# Altium PCB AT89S52单片机入门与提高_粗.PcbDoc (part 2 of 5)
Units mm, origin at the board's own origin, x right, y up, seen from the top; angles counter-clockwise.
Board outline 152.4 x 101.6 mm, 2 copper layers (Top Layer, Bottom Layer); 111 components, 112 nets, 451 pads, 42 vias.
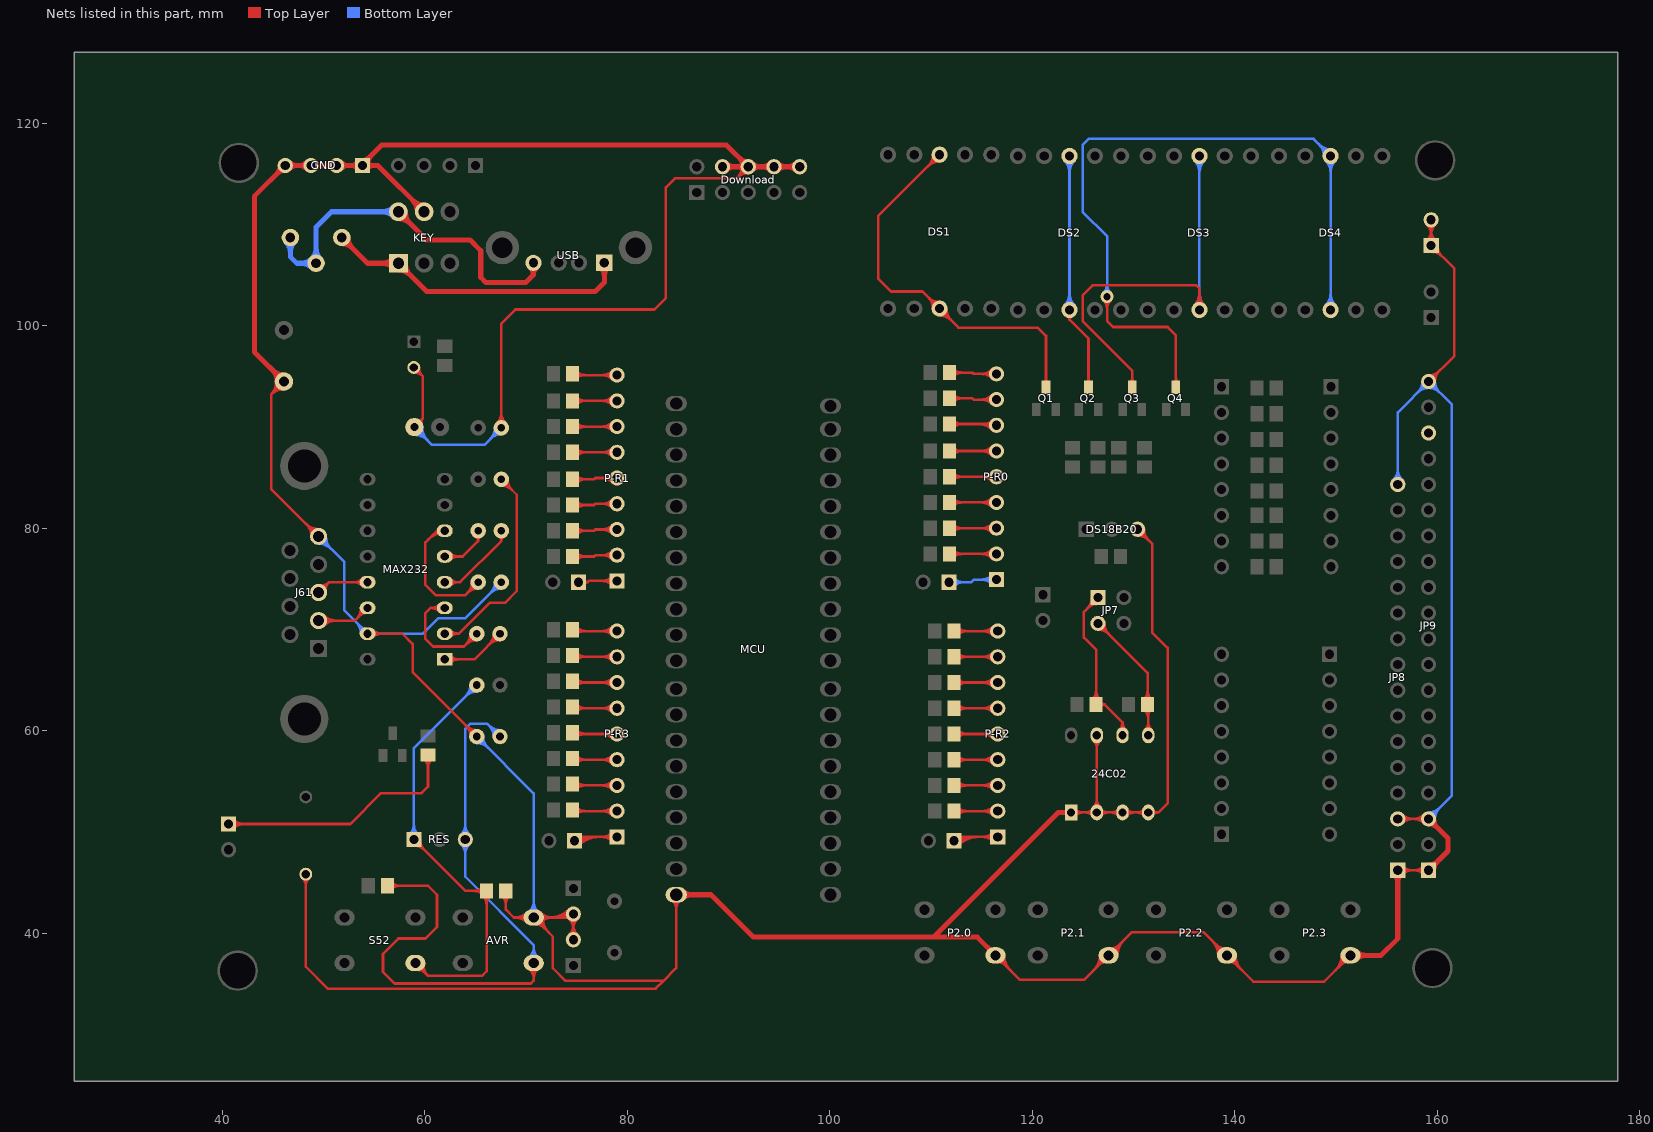
[diagram p2: the nets of this part, all layers, seen from the top]

## Via types
v1: diameter 1.27, hole 0.711, Top Layer to Bottom Layer, 42 vias

## Nets (pads, with @x,y where several pads share a name; then routed paths per layer and width w, separated by ;. In a path a pad name is that pad's centre, name@x,y a point inside that pad or via, vN(x,y) a via of type N, cw(c..) or ccw(c..) an arc to the next point about the centre after c; other vN are vias at no path point) (continued)
GND: 24C02.1 24C02.2 24C02.3 24C02.4 24C02.7 +5V.2@46.101,94.488 AVR.2 C1.2 C3.2 C5.2 C8.1 CX1.2 CX2.2 Download.4 Download.6 Download.8 Download.10 DS18B20.3 GND.1 GND.2 GND.3 GND.4 J61.5 JP8.1 JP8.3 JP8.16 JP9.1 JP9.3 JP9.20 KEY.3 LED1.2 LS1.2 MAX232.15 MCU.20 P2.0.1@116.355,37.831 P2.1.1 P2.2.1 P2.3.1 R51.2 | length 843.5
  Top Layer w0.254: +5V.2@45.317,94.458 cw(c43.656,94.393) 44.831,93.218 ; +5V.2@45.57,94.467 cw(c44.447,94.424) 45.242,93.629 cw(c46.037,92.834) +5V.2@46.08,93.957 ; +5V.2@46.071,93.704 ccw(c46.006,92.043) 44.831,93.218 ; +5V.2@46.101,94.488 44.831,93.218 ; LS1.2@47.901,45.488 cw(c47.034,44.621) 48.26,44.621 cw(c49.486,44.621) LS1.2@48.619,45.488 ; LS1.2@48.26,45.847 48.26,36.703 50.419,34.544 82.804,34.544 83.566,35.306 ; J61.5@48.81,79.2 ccw(c47.077,79.2) 48.302,80.426 ccw(c49.528,81.651) J61.5@49.528,79.918 ; J61.5@49.064,79.2 ccw(c47.944,79.2) 48.736,79.992 ccw(c49.528,80.784) J61.5@49.528,79.664 ; J61.5@49.528,79.2 44.831,83.897 44.831,93.218 ; MAX232.15@54.36,69.597 57.784,69.597 58.801,68.58 58.801,65.786 C3.2@65.151,59.436 ; MAX232.15@54.874,69.245 cw(c55.724,68.395) 55.724,69.597 cw(c55.724,70.799) MAX232.15@54.874,69.949 ; LED1.2@58.928,95.377 cw(c58.928,94.151) 59.795,95.018 cw(c60.662,95.885) LED1.2@59.436,95.885 ; LED1.2@58.928,95.885 59.817,94.996 59.817,90.83 ; C1.2@58.979,89.992 59.817,90.83 ; C3.2@64.516,59.436 ccw(c62.983,59.436) 64.067,60.52 ccw(c65.151,61.604) C3.2@65.151,60.071 ; C3.2@64.77,59.436 ccw(c63.85,59.436) 64.501,60.086 ccw(c65.151,60.737) C3.2@65.151,59.817 ; C5.2@67.115,90.365 ccw(c66.031,91.449) 67.564,91.449 ccw(c69.097,91.449) C5.2@68.013,90.365 ; C5.2@67.295,90.185 ccw(c66.644,90.836) 67.564,90.836 ccw(c68.484,90.836) C5.2@67.833,90.185 ; C5.2@67.564,89.916 67.564,100.203 68.961,101.6 82.677,101.6 83.82,102.743 83.82,113.665 84.709,114.554 90.805,114.554 Download.6@91.948,115.697 ; R51.2@67.636,43.726 cw(c66.743,42.833) 68.006,42.833 cw(c69.269,42.833) R51.2@68.376,43.726 ; R51.2@68.006,44.196 68.006,42.357 68.794,41.569 AVR.2@70.762,41.569 ; AVR.2@70.086,41.093 ccw(c68.937,39.944) 68.937,41.569 ccw(c68.937,43.194) AVR.2@70.086,42.045 ; AVR.2@70.266,41.273 ccw(c69.55,40.558) 69.55,41.569 ccw(c69.55,42.581) AVR.2@70.266,41.865 ; AVR.2@70.962,40.896 cw(c70.962,39.754) 71.769,40.562 ; AVR.2@71.258,41.273 cw(c71.974,40.558) 71.974,41.569 cw(c71.974,42.581) AVR.2@71.258,41.865 ; AVR.2@71.381,41.569 ccw(c72.875,41.569) 71.819,40.512 ; AVR.2@71.438,41.093 cw(c72.587,39.944) 72.587,41.569 cw(c72.587,43.194) AVR.2@71.438,42.045 ; AVR.2@71.635,41.569 ccw(c73.743,41.569) 72.252,40.079 ; 72.349,41.569 ccw(c72.349,44.237) CX2.2@74.235,42.351 ; 72.962,41.569 ccw(c72.962,43.624) CX2.2@74.415,42.171 ; 73.576,41.569 ccw(c73.576,43.01) CX2.2@74.595,41.991 ; 73.995,41.569 cw(c73.995,41.229) 74.235,41.469 cw(c73.172,40.406) 74.676,40.406 cw(c76.18,40.406) CX2.2@75.117,41.469 ; CX1.2@74.235,39.811 ccw(c73.172,40.874) 74.676,40.874 ccw(c76.18,40.874) CX1.2@75.117,39.811 ; CX1.2@74.415,39.631 ccw(c73.785,40.261) 74.676,40.261 ccw(c75.567,40.261) CX1.2@74.937,39.631 ; CX2.2@74.415,41.649 cw(c73.785,41.019) 74.676,41.019 cw(c75.567,41.019) CX2.2@74.937,41.649 ; CX1.2@74.676,39.37 CX2.2@74.676,41.91 74.335,41.569 AVR.2@70.762,41.569 ; MCU.20@84.394,43.373 cw(c83.326,42.305) 84.836,42.305 cw(c86.346,42.305) MCU.20@85.278,43.373 ; MCU.20@84.573,43.552 cw(c83.939,42.918) 84.836,42.918 cw(c85.733,42.918) MCU.20@85.099,43.552 ; MCU.20@84.836,43.815 84.836,36.576 83.566,35.306 ; Download.6@91.325,115.697 cw(c89.821,115.697) 90.884,114.633 cw(c91.948,113.57) Download.6@91.948,115.074 ; Download.6@91.579,115.697 cw(c90.688,115.697) 91.318,115.067 cw(c91.948,114.437) Download.6@91.948,115.328 ; 113.284,42.672 120.27,49.658 ; P2.0.1@116.355,37.831 118.753,35.433 125.133,35.433 P2.1.1@127.531,37.831 129.832,40.132 136.914,40.132 P2.2.1@139.215,37.831 141.821,35.225 148.801,35.225 P2.3.1@151.407,37.831 ; P2.0.1@116.555,37.158 cw(c116.555,36.016) 117.362,36.824 ; P2.0.1@116.974,37.831 ccw(c118.468,37.831) 117.412,36.775 ; P2.0.1@117.228,37.831 ccw(c119.336,37.831) 117.845,36.341 ; 24C02.1@123.826,51.939 24C02.4@131.446,51.939 132.457,51.939 ; 24C02.2@126.025,52.458 ccw(c125.201,53.282) 126.366,53.282 ccw(c127.531,53.282) 24C02.2@126.707,52.458 ; 24C02.7@126.025,59.04 cw(c125.201,58.216) 126.366,58.216 cw(c127.531,58.216) 24C02.7@126.707,59.04 ; 126.041,36.341 ccw(c124.55,37.831) P2.1.1@126.658,37.831 ; 24C02.2@126.366,51.939 24C02.7@126.366,59.559 ; 126.474,36.775 ccw(c125.418,37.831) P2.1.1@126.912,37.831 ; 126.524,36.824 cw(c127.331,36.016) P2.1.1@127.331,37.158 ; P2.1.1@127.731,38.504 ccw(c127.731,39.646) 128.538,38.839 ; P2.1.1@128.15,37.831 cw(c129.644,37.831) 128.588,38.888 ; P2.1.1@128.404,37.831 cw(c130.512,37.831) 129.021,39.322 ; 24C02.3@129.247,51.598 cw(c130.071,50.774) 130.071,51.939 cw(c130.071,53.104) 24C02.3@129.247,52.28 ; DS18B20.3@130.399,79.282 cw(c130.399,77.778) 131.463,78.841 cw(c132.526,79.905) DS18B20.3@131.022,79.905 ; DS18B20.3@130.399,79.536 cw(c130.399,78.645) 131.029,79.275 cw(c131.659,79.905) DS18B20.3@130.768,79.905 ; DS18B20.3@130.399,79.905 131.826,78.478 131.826,69.723 133.35,68.199 133.35,52.832 132.457,51.939 ; 24C02.4@131.105,51.598 ccw(c130.281,50.774) 130.281,51.939 ccw(c130.281,53.104) 24C02.4@131.105,52.28 ; 24C02.4@131.821,51.636 cw(c132.457,51.121) 132.457,51.939 ; 24C02.4@131.821,52.243 ccw(c132.457,52.757) 132.457,51.939 ; 137.725,39.322 cw(c136.234,37.831) P2.2.1@138.342,37.831 ; 138.158,38.888 cw(c137.102,37.831) P2.2.1@138.596,37.831 ; 138.208,38.839 ccw(c139.015,39.646) P2.2.1@139.015,38.504 ; P2.2.1@139.415,37.158 cw(c139.415,36.016) 140.222,36.824 ; P2.2.1@139.834,37.831 ccw(c141.328,37.831) 140.272,36.775 ; P2.2.1@140.088,37.831 ccw(c142.196,37.831) 140.705,36.341 ; 149.917,36.341 ccw(c148.426,37.831) P2.3.1@150.534,37.831 ; 150.35,36.775 ccw(c149.294,37.831) P2.3.1@150.788,37.831 ; 150.4,36.824 cw(c151.207,36.016) P2.3.1@151.207,37.158 ; JP8.1@156.083,46.228 JP9.1@159.131,46.228 ; JP8.3@156.083,51.308 JP9.3@159.131,51.308 ; JP8.1@156.344,45.967 cw(c156.974,45.337) 156.974,46.228 cw(c156.974,47.119) JP8.1@156.344,46.489 ; JP8.3@156.344,51.047 cw(c156.974,50.417) 156.974,51.308 cw(c156.974,52.199) JP8.3@156.344,51.569 ; JP8.1@156.524,45.787 cw(c157.587,44.724) 157.587,46.228 cw(c157.587,47.732) JP8.1@156.524,46.669 ; JP8.3@156.524,50.867 cw(c157.587,49.804) 157.587,51.308 cw(c157.587,52.812) JP8.3@156.524,51.749 ; JP9.1@158.69,45.787 ccw(c157.627,44.724) 157.627,46.228 ccw(c157.627,47.732) JP9.1@158.69,46.669 ; JP9.3@158.69,50.867 ccw(c157.627,49.804) 157.627,51.308 ccw(c157.627,52.812) JP9.3@158.69,51.749 ; JP9.1@158.87,45.967 ccw(c158.24,45.337) 158.24,46.228 ccw(c158.24,47.119) JP9.1@158.87,46.489 ; JP9.3@158.87,51.047 ccw(c158.24,50.417) 158.24,51.308 ccw(c158.24,52.199) JP9.3@158.87,51.569 ; GND.1@158.939,108.361 ccw(c157.876,109.424) 159.38,109.424 ccw(c160.884,109.424) GND.1@159.821,108.361 ; GND.2@158.939,110.019 cw(c157.876,108.956) 159.38,108.956 cw(c160.884,108.956) GND.2@159.821,110.019 ; GND.1@159.119,108.181 ccw(c158.489,108.811) 159.38,108.811 ccw(c160.271,108.811) GND.1@159.641,108.181 ; GND.2@159.119,110.199 cw(c158.489,109.569) 159.38,109.569 cw(c160.271,109.569) GND.2@159.641,110.199 ; JP9.20@159.131,94.488 161.671,97.028 161.671,105.629 GND.1@159.38,107.92 GND.2@159.38,110.46 ; JP9.20@159.131,94.857 ccw(c159.131,95.748) 159.761,95.118 ccw(c160.391,94.488) JP9.20@159.5,94.488 ; JP9.20@159.131,95.111 ccw(c159.131,96.615) 160.195,95.552 ccw(c161.258,94.488) JP9.20@159.754,94.488 ; GND.1@159.38,107.297 cw(c159.38,105.793) 160.444,106.856 cw(c161.507,107.92) GND.1@160.003,107.92 ; GND.1@159.38,107.551 cw(c159.38,106.66) 160.01,107.29 cw(c160.64,107.92) GND.1@159.749,107.92 ; 59.817,90.83 ccw(c60.186,90.461) 59.699,90.272 cw(c60.186,90.461) 59.817,90.83 ; 59.817,90.83 cw(c59.448,91.2) 59.259,90.713 ccw(c59.448,91.2) 59.817,90.83 ; AVR.2@70.762,41.569 72.644,39.687 72.644,36.576 73.914,35.306 83.566,35.306 ; 24C02.1@124.167,51.598 cw(c124.991,50.774) 124.991,51.939 ; 24C02.1@124.167,51.598 cw(c124.991,50.774) 124.991,51.939 ; 24C02.1@124.167,51.598 cw(c124.991,50.774) 124.991,51.939 ; 24C02.1@124.167,52.28 ccw(c124.991,53.104) 124.991,51.939 ; 24C02.1@124.167,52.28 ccw(c124.991,53.104) 124.991,51.939 ; 24C02.1@124.167,52.28 ccw(c124.991,53.104) 124.991,51.939 ; 125.201,51.939 ccw(c125.201,53.104) 24C02.2@126.025,52.28 ; 125.201,51.939 cw(c125.201,50.774) 24C02.2@126.025,51.598 ; 125.201,51.939 ccw(c125.201,53.104) 24C02.2@126.025,52.28 ; 125.201,51.939 cw(c125.201,50.774) 24C02.2@126.025,51.598 ; 125.201,51.939 ccw(c125.201,53.104) 24C02.2@126.025,52.28 ; 125.201,51.939 cw(c125.201,50.774) 24C02.2@126.025,51.598 ; 127.531,51.939 ccw(c127.531,50.774) 126.707,51.598 cw(c127.531,50.774) 127.531,51.939 ; 127.531,51.939 cw(c127.531,53.104) 126.707,52.28 ccw(c127.531,53.104) 127.531,51.939 ; 127.741,51.939 ccw(c127.741,53.104) 128.565,52.28 cw(c127.741,53.104) 127.741,51.939 ; 127.741,51.939 cw(c127.741,50.774) 128.565,51.598 ccw(c127.741,50.774) 127.741,51.939
  Top Layer w0.5: +5V.2@45.439,94.488 ccw(c43.841,94.488) 44.971,95.618 ccw(c46.101,96.748) +5V.2@46.101,95.15 ; GND.4@45.728,115.824 cw(c44.521,115.824) 45.374,114.97 cw(c46.228,114.117) GND.4@46.228,115.324 ; +5V.2@46.101,94.488 43.18,97.409 43.18,112.776 GND.4@46.228,115.824 55.372,115.824 KEY.3@59.944,111.252 ; GND.4@46.582,115.47 cw(c47.435,114.617) 47.435,115.824 cw(c47.435,117.031) GND.4@46.582,116.178 ; GND.3@48.414,115.47 ccw(c47.561,114.617) 47.561,115.824 ccw(c47.561,117.031) GND.3@48.414,116.178 ; GND.3@49.122,115.47 cw(c49.975,114.617) 49.975,115.824 cw(c49.975,117.031) GND.3@49.122,116.178 ; GND.2@50.954,115.47 ccw(c50.101,114.617) 50.101,115.824 ccw(c50.101,117.031) GND.2@50.954,116.178 ; GND.2@51.662,115.47 cw(c52.515,114.617) 52.515,115.824 cw(c52.515,117.031) GND.2@51.662,116.178 ; GND.1@53.494,115.47 ccw(c52.641,114.617) 52.641,115.824 ccw(c52.641,117.031) GND.1@53.494,116.178 ; GND.1@53.848,115.824 53.848,115.951 55.753,117.856 89.789,117.856 Download.6@91.948,115.697 ; GND.1@53.848,116.324 ccw(c53.848,117.224) 54.485,116.588 ; GND.1@54.202,115.47 cw(c55.055,114.617) 55.055,115.824 cw(c55.055,117.031) GND.1@54.202,116.178 ; GND.1@54.348,115.824 cw(c55.862,115.824) 54.791,116.894 ; KEY.3@59.269,111.252 ccw(c57.639,111.252) 58.792,112.404 ccw(c59.944,113.557) KEY.3@59.944,111.927 ; MCU.20@84.836,43.815 88.265,43.815 92.456,39.624 114.562,39.624 P2.0.1@116.355,37.831 ; MCU.20@85.491,43.46 cw(c86.349,42.602) 86.349,43.815 cw(c86.349,45.028) MCU.20@85.491,44.17 ; Download.4@89.408,115.697 Download.10@97.028,115.697 ; Download.4@89.762,115.343 cw(c90.615,114.49) 90.615,115.697 cw(c90.615,116.904) Download.4@89.762,116.051 ; Download.6@91.448,115.697 ccw(c90.241,115.697) 91.094,116.551 ccw(c91.948,117.404) Download.6@91.948,116.197 ; Download.6@92.302,115.343 cw(c93.155,114.49) 93.155,115.697 cw(c93.155,116.904) Download.6@92.302,116.051 ; Download.8@94.134,115.343 ccw(c93.281,114.49) 93.281,115.697 ccw(c93.281,116.904) Download.8@94.134,116.051 ; Download.8@94.842,115.343 cw(c95.695,114.49) 95.695,115.697 cw(c95.695,116.904) Download.8@94.842,116.051 ; Download.10@96.674,115.343 ccw(c95.821,114.49) 95.821,115.697 ccw(c95.821,116.904) Download.10@96.674,116.051 ; 110.236,39.624 122.551,51.939 24C02.1@123.826,51.939 ; P2.3.1@151.407,37.831 154.432,37.831 156.083,39.482 JP8.1@156.083,46.228 ; P2.3.1@151.996,37.442 cw(c152.935,36.503) 152.935,37.831 cw(c152.935,39.159) P2.3.1@151.996,38.22 ; JP8.1@155.729,45.874 cw(c154.876,45.021) 156.083,45.021 cw(c157.29,45.021) JP8.1@156.437,45.874 ; JP9.1@159.131,46.228 161.036,48.133 161.036,49.403 JP9.3@159.131,51.308 ; JP9.1@159.131,46.728 ccw(c159.131,47.935) 159.985,47.082 ccw(c160.838,46.228) JP9.1@159.631,46.228 ; JP9.3@159.131,50.808 cw(c159.131,49.601) 159.985,50.454 cw(c160.838,51.308) JP9.3@159.631,51.308 ; 90.741,115.697 ccw(c90.741,116.904) 91.594,116.051 cw(c90.741,116.904) 90.741,115.697 ; 90.741,115.697 cw(c90.741,114.49) 91.594,115.343 ccw(c90.741,114.49) 90.741,115.697
  Bottom Layer w0.254: J61.5@49.528,79.2 52.07,76.658 52.07,71.887 MAX232.15@54.36,69.597 59.818,69.597 61.341,71.12 64.008,71.12 C8.1@67.564,74.676 ; C1.2@58.979,89.992 60.731,88.24 65.888,88.24 C5.2@67.564,89.916 ; C3.2@65.151,59.436 70.762,53.825 AVR.2@70.762,41.569 ; JP8.16@156.083,84.328 156.083,91.44 JP9.20@159.131,94.488 161.417,92.202 161.417,53.594 JP9.3@159.131,51.308 ; 50.32,78.408 ccw(c49.528,77.616) 49.528,78.736 cw(c49.528,77.616) 50.32,78.408 ; 50.32,78.408 cw(c51.112,79.2) 49.992,79.2 ccw(c51.112,79.2) 50.32,78.408 ; 50.754,77.974 ccw(c49.528,76.749) 49.528,78.482 cw(c49.528,76.749) 50.754,77.974 ; 50.754,77.974 cw(c51.979,79.2) 50.246,79.2 ccw(c51.979,79.2) 50.754,77.974 ; 55.724,69.597 ccw(c55.724,68.395) 54.874,69.245 cw(c55.724,68.395) 55.724,69.597 ; 55.724,69.597 cw(c55.724,70.799) 54.874,69.949 ccw(c55.724,70.799) 55.724,69.597 ; 59.865,89.106 ccw(c58.979,88.22) 58.979,89.473 cw(c58.979,88.22) 59.865,89.106 ; 59.865,89.106 cw(c60.751,89.992) 59.498,89.992 ccw(c60.751,89.992) 59.865,89.106 ; 60.298,88.673 ccw(c58.979,87.353) 58.979,89.219 cw(c58.979,87.353) 60.298,88.673 ; 60.298,88.673 cw(c61.618,89.992) 59.752,89.992 ccw(c61.618,89.992) 60.298,88.673 ; 65.801,58.786 ccw(c65.151,58.135) 65.151,59.055 cw(c65.151,58.135) 65.801,58.786 ; 65.801,58.786 cw(c66.452,59.436) 65.532,59.436 ccw(c66.452,59.436) 65.801,58.786 ; 66.235,58.352 ccw(c65.151,57.268) 65.151,58.801 cw(c65.151,57.268) 66.235,58.352 ; 66.235,58.352 cw(c67.319,59.436) 65.786,59.436 ccw(c67.319,59.436) 66.235,58.352 ; 66.48,73.592 ccw(c65.396,74.676) 66.929,74.676 cw(c65.396,74.676) 66.48,73.592 ; 66.48,73.592 cw(c67.564,72.508) 67.564,74.041 ccw(c67.564,72.508) 66.48,73.592 ; 66.48,88.832 ccw(c65.396,89.916) 66.929,89.916 cw(c65.396,89.916) 66.48,88.832 ; 66.48,88.832 cw(c67.564,87.748) 67.564,89.281 ccw(c67.564,87.748) 66.48,88.832 ; 66.914,74.026 ccw(c66.263,74.676) 67.183,74.676 cw(c66.263,74.676) 66.914,74.026 ; 66.914,74.026 cw(c67.564,73.375) 67.564,74.295 ccw(c67.564,73.375) 66.914,74.026 ; 66.914,89.266 ccw(c66.263,89.916) 67.183,89.916 cw(c66.263,89.916) 66.914,89.266 ; 66.914,89.266 cw(c67.564,88.615) 67.564,89.535 ccw(c67.564,88.615) 66.914,89.266 ; 70.762,42.581 ccw(c71.774,42.581) 71.058,41.865 cw(c71.774,42.581) 70.762,42.581 ; 70.762,42.581 cw(c69.75,42.581) 70.466,41.865 ccw(c69.75,42.581) 70.762,42.581 ; 70.762,43.194 ccw(c72.387,43.194) 71.238,42.045 cw(c72.387,43.194) 70.762,43.194 ; 70.762,43.194 cw(c69.137,43.194) 70.286,42.045 ccw(c69.137,43.194) 70.762,43.194 ; 156.083,85.219 ccw(c156.974,85.219) 156.344,84.589 cw(c156.974,85.219) 156.083,85.219 ; 156.083,85.219 cw(c155.192,85.219) 155.822,84.589 ccw(c155.192,85.219) 156.083,85.219 ; 156.083,85.832 ccw(c157.587,85.832) 156.524,84.769 cw(c157.587,85.832) 156.083,85.832 ; 156.083,85.832 cw(c154.579,85.832) 155.642,84.769 ccw(c154.579,85.832) 156.083,85.832 ; 158.067,93.424 ccw(c157.004,94.488) 158.508,94.488 cw(c157.004,94.488) 158.067,93.424 ; 158.067,93.424 cw(c159.131,92.361) JP9.20@159.131,93.865 ; 158.067,93.424 cw(c159.131,92.361) JP9.20@159.131,93.865 ; 158.501,93.858 ccw(c157.871,94.488) 158.762,94.488 cw(c157.871,94.488) 158.501,93.858 ; 158.501,93.858 cw(c159.131,93.228) JP9.20@159.131,94.119 ; 158.501,93.858 cw(c159.131,93.228) JP9.20@159.131,94.119 ; JP9.20@159.131,93.865 cw(c159.131,92.361) 160.195,93.424 ; JP9.20@159.131,93.865 cw(c159.131,92.361) 160.195,93.424 ; JP9.20@159.131,94.119 cw(c159.131,93.228) 159.761,93.858 ; JP9.20@159.131,94.119 cw(c159.131,93.228) 159.761,93.858 ; 159.761,51.938 ccw(c160.391,51.308) 159.5,51.308 cw(c160.391,51.308) 159.761,51.938 ; 159.761,51.938 cw(c159.131,52.568) 159.131,51.677 ccw(c159.131,52.568) 159.761,51.938 ; 159.761,93.858 cw(c160.391,94.488) 159.5,94.488 ccw(c160.391,94.488) 159.761,93.858 ; 160.195,52.372 ccw(c161.258,51.308) 159.754,51.308 cw(c161.258,51.308) 160.195,52.372 ; 160.195,52.372 cw(c159.131,53.435) 159.131,51.931 ccw(c159.131,53.435) 160.195,52.372 ; 160.195,93.424 cw(c161.258,94.488) 159.754,94.488 ccw(c161.258,94.488) 160.195,93.424 ; 53.232,70.724 cw(c52.105,69.597) 53.699,69.597 ccw(c52.105,69.597) 53.232,70.724 ; 53.624,70.332 ccw(c54.197,70.905) 54.197,70.095 cw(c54.197,70.905) 53.624,70.332 ; 53.666,70.291 cw(c52.972,69.597) 53.953,69.597 ccw(c52.972,69.597) 53.666,70.291
NetAVR_1: AVR.1 C3.1 Ravr.1 RES.3 | length 101.1
  Top Layer w0.254: Ravr.1@56.322,44.704 60.325,44.704 61.214,43.815 61.214,40.64 60.071,39.497 57.404,39.497 55.88,37.973 55.88,36.195 57.023,35.052 70.485,35.052 70.762,35.329 AVR.1@70.762,37.069 ; Ravr.1@56.692,44.334 cw(c57.585,43.441) 57.585,44.704 cw(c57.585,45.967) Ravr.1@56.692,45.074 ; AVR.1@70.286,36.593 cw(c69.137,35.444) 70.762,35.444 cw(c72.387,35.444) AVR.1@71.238,36.593 ; AVR.1@70.466,36.773 cw(c69.75,36.058) 70.762,36.058 cw(c71.774,36.058) AVR.1@71.058,36.773
  Bottom Layer w0.254: C3.1@67.437,59.436 66.167,60.706 64.516,60.706 64.008,60.198 RES.3@64.008,49.276 64.008,45.593 70.762,38.839 AVR.1@70.762,37.069 ; 64.008,47.772 ccw(c62.504,47.772) 63.567,48.835 cw(c62.504,47.772) 64.008,47.772 ; 64.008,47.772 cw(c65.512,47.772) 64.449,48.835 ccw(c65.512,47.772) 64.008,47.772 ; 64.008,48.385 ccw(c63.117,48.385) 63.747,49.015 cw(c63.117,48.385) 64.008,48.385 ; 64.008,48.385 cw(c64.899,48.385) 64.269,49.015 ccw(c64.899,48.385) 64.008,48.385 ; 64.008,50.167 ccw(c64.899,50.167) 64.269,49.537 cw(c64.899,50.167) 64.008,50.167 ; 64.008,50.167 cw(c63.117,50.167) 63.747,49.537 ccw(c63.117,50.167) 64.008,50.167 ; 64.008,50.78 ccw(c65.512,50.78) 64.449,49.717 cw(c65.512,50.78) 64.008,50.78 ; 64.008,50.78 cw(c62.504,50.78) 63.567,49.717 ccw(c62.504,50.78) 64.008,50.78 ; 66.353,60.52 ccw(c67.437,61.604) 67.437,60.071 cw(c67.437,61.604) 66.353,60.52 ; 66.353,60.52 cw(c65.269,59.436) 66.802,59.436 ccw(c65.269,59.436) 66.353,60.52 ; 66.787,60.086 ccw(c67.437,60.737) 67.437,59.817 cw(c67.437,60.737) 66.787,60.086 ; 66.787,60.086 cw(c66.136,59.436) 67.056,59.436 ccw(c66.136,59.436) 66.787,60.086 ; 70.762,38.081 ccw(c71.774,38.081) 71.058,37.365 cw(c71.774,38.081) 70.762,38.081 ; 70.762,38.081 cw(c69.75,38.081) 70.466,37.365 ccw(c69.75,38.081) 70.762,38.081 ; 70.762,38.694 ccw(c72.387,38.694) 71.238,37.545 cw(c72.387,38.694) 70.762,38.694 ; 70.762,38.694 cw(c69.137,38.694) 70.286,37.545 ccw(c69.137,38.694) 70.762,38.694
NetC2_2: C2.2 R51.1 RES.1 S52.1 | length 68.5
  Top Layer w0.254: RES.1@58.928,48.653 cw(c58.928,47.149) 59.992,48.212 cw(c61.055,49.276) RES.1@59.551,49.276 ; RES.1@58.928,48.907 cw(c58.928,48.016) 59.558,48.646 cw(c60.188,49.276) RES.1@59.297,49.276 ; RES.1@58.928,49.276 64.008,44.196 R51.1@66.106,44.196 66.106,36.261 65.659,35.814 60.333,35.814 S52.1@59.078,37.069 ; S52.1@59.278,36.396 cw(c59.278,35.254) 60.085,36.062 ; S52.1@59.687,36.98 ccw(c60.471,36.81) 59.904,36.243 ; S52.1@59.936,36.926 ccw(c61.012,36.693) 60.233,35.914 ; R51.1@65.736,43.726 cw(c64.843,42.833) 66.106,42.833 cw(c67.369,42.833) R51.1@66.476,43.726 ; R51.1@65.736,43.826 ccw(c64.843,42.933) 64.843,44.196 ccw(c64.843,45.459) R51.1@65.736,44.566
  Bottom Layer w0.254: RES.1@58.928,49.276 58.928,58.293 C2.2@65.151,64.516 ; 58.928,50.167 ccw(c59.819,50.167) 59.189,49.537 cw(c59.819,50.167) 58.928,50.167 ; 58.928,50.167 cw(c58.037,50.167) 58.667,49.537 ccw(c58.037,50.167) 58.928,50.167 ; 58.928,50.78 ccw(c60.432,50.78) 59.369,49.717 cw(c60.432,50.78) 58.928,50.78 ; 58.928,50.78 cw(c57.424,50.78) 58.487,49.717 ccw(c57.424,50.78) 58.928,50.78 ; 64.067,63.432 ccw(c62.983,64.516) 64.516,64.516 cw(c62.983,64.516) 64.067,63.432 ; 64.067,63.432 cw(c65.151,62.348) 65.151,63.881 ccw(c65.151,62.348) 64.067,63.432 ; 64.501,63.866 ccw(c63.85,64.516) 64.77,64.516 cw(c63.85,64.516) 64.501,63.866 ; 64.501,63.866 cw(c65.151,63.215) 65.151,64.135 ccw(c65.151,63.215) 64.501,63.866
NetC6_1: C6.1 MAX232.2 | length 26.3
  Top Layer w0.254: MAX232.2@61.98,69.597 63.374,69.597 66.421,72.644 67.945,72.644 69.088,73.787 69.088,83.312 C6.1@67.564,84.836 ; MAX232.2@62.494,69.245 cw(c63.344,68.395) 63.344,69.597 cw(c63.344,70.799) MAX232.2@62.494,69.949 ; C6.1@67.564,84.201 cw(c67.564,82.668) 68.648,83.752 cw(c69.732,84.836) C6.1@68.199,84.836 ; C6.1@67.564,84.455 cw(c67.564,83.535) 68.214,84.186 cw(c68.865,84.836) C6.1@67.945,84.836
NetC7_1: C7.1 MAX232.4 | length 12.4
  Top Layer w0.254: MAX232.4@61.98,74.677 63.501,74.677 67.564,78.74 ; MAX232.4@62.494,74.325 cw(c63.344,73.475) 63.344,74.677 cw(c63.344,75.879) MAX232.4@62.494,75.029 ; C7.1@67.564,79.756 67.564,78.74 ; 67.564,78.74 ccw(c67.069,78.74) 67.286,79.185 cw(c67.069,78.74) 67.564,78.74 ; 67.564,78.74 cw(c68.059,78.74) 67.842,79.185 ccw(c68.059,78.74) 67.564,78.74
NetC7_2: C7.2 MAX232.5 | length 9
  Top Layer w0.254: MAX232.5@61.98,77.217 63.755,77.217 65.278,78.74 ; MAX232.5@62.494,76.865 cw(c63.344,76.015) 63.344,77.217 cw(c63.344,78.419) MAX232.5@62.494,77.569 ; C7.2@65.278,79.756 65.278,78.74 ; 65.278,78.74 ccw(c64.783,78.74) 65,79.185 cw(c64.783,78.74) 65.278,78.74 ; 65.278,78.74 cw(c65.773,78.74) 65.556,79.185 ccw(c65.773,78.74) 65.278,78.74
NetC8_2: C8.2 MAX232.6 | length 19.3
  Top Layer w0.254: 60.372,78.914 cw(c61.817,77.469) MAX232.6@61.817,79.513 ; 60.806,79.348 cw(c61.817,78.337) MAX232.6@61.817,79.767 ; MAX232.6@61.98,79.757 61.215,79.757 60.071,78.613 60.071,74.422 61.087,73.406 64.008,73.406 C8.2@65.278,74.676 ; C8.2@64.643,74.676 cw(c63.11,74.676) 64.194,73.592 cw(c65.278,72.508) C8.2@65.278,74.041 ; C8.2@64.897,74.676 cw(c63.977,74.676) 64.628,74.026 cw(c65.278,73.375) C8.2@65.278,74.295
NetC9_1: C9.1 MAX232.1 | length 12.3
  Top Layer w0.254: MAX232.1@61.98,67.057 64.898,67.057 C9.1@67.437,69.596 ; MAX232.1@62.494,66.705 cw(c63.344,65.855) 63.344,67.057 cw(c63.344,68.259) MAX232.1@62.494,67.409 ; C9.1@66.802,69.596 cw(c65.269,69.596) 66.353,68.512 cw(c67.437,67.428) C9.1@67.437,68.961 ; C9.1@67.056,69.596 cw(c66.136,69.596) 66.787,68.946 cw(c67.437,68.295) C9.1@67.437,69.215
NetC9_2: C9.2 MAX232.3 | length 16.3
  Top Layer w0.254: MAX232.3@61.465,71.785 ccw(c60.615,70.935) 60.615,72.137 ccw(c60.615,73.339) MAX232.3@61.465,72.489 ; MAX232.3@61.98,72.137 60.58,72.137 60.071,71.628 60.071,69.088 60.833,68.326 63.881,68.326 C9.2@65.151,69.596 ; C9.2@64.516,69.596 cw(c62.983,69.596) 64.067,68.512 cw(c65.151,67.428) C9.2@65.151,68.961 ; C9.2@64.77,69.596 cw(c63.85,69.596) 64.501,68.946 cw(c65.151,68.295) C9.2@65.151,69.215
NetD1-0_1: D1-0.1 P-R0.1 | length 10.4
  Top Layer w0.254: D1-0.1@111.821,95.377 114.071,95.377 114.198,95.25 P-R0.1@116.459,95.25 ; D1-0.1@112.191,95.007 cw(c113.084,94.114) 113.084,95.377 cw(c113.084,96.64) D1-0.1@112.191,95.747 ; P-R0.1@116.018,94.809 ccw(c114.955,93.746) 114.955,95.25 ccw(c114.955,96.754) P-R0.1@116.018,95.691 ; P-R0.1@116.198,94.989 ccw(c115.568,94.359) 115.568,95.25 ccw(c115.568,96.141) P-R0.1@116.198,95.511
NetD1-1_1: D1-1.1 P-R1.1 | length 10.8
  Top Layer w0.254: D1-1.1@74.61,95.25 74.737,95.123 P-R1.1@78.994,95.123 ; D1-1.1@74.8,95.34 ccw(c75.325,95.865) 75.325,95.123 ; D1-1.1@74.98,94.78 cw(c75.807,93.953) 75.807,95.123 ; D1-1.1@74.98,95.52 ccw(c75.938,96.478) 75.938,95.123 ; P-R1.1@78.553,94.682 ccw(c77.49,93.619) 77.49,95.123 ccw(c77.49,96.627) P-R1.1@78.553,95.564 ; P-R1.1@78.733,94.862 ccw(c78.103,94.232) 78.103,95.123 ccw(c78.103,96.014) P-R1.1@78.733,95.384
NetD1-2_1: D1-2.1 P-R2.2 | length 10.1
  Top Layer w0.254: D1-2.1@112.268,52.07 P-R2.2@116.586,52.07 ; D1-2.1@112.638,51.7 cw(c113.531,50.807) 113.531,52.07 cw(c113.531,53.333) D1-2.1@112.638,52.44 ; P-R2.2@116.145,51.629 ccw(c115.082,50.566) 115.082,52.07 ccw(c115.082,53.574) P-R2.2@116.145,52.511 ; P-R2.2@116.325,51.809 ccw(c115.695,51.179) 115.695,52.07 ccw(c115.695,52.961) P-R2.2@116.325,52.331
NetD1-3_1: D1-3.1 P-R3.1 | length 10.8
  Top Layer w0.254: D1-3.1@74.61,69.977 74.737,69.85 P-R3.1@78.994,69.85 ; D1-3.1@74.8,70.067 ccw(c75.325,70.592) 75.325,69.85 ; D1-3.1@74.98,69.507 cw(c75.807,68.68) 75.807,69.85 ; D1-3.1@74.98,70.247 ccw(c75.938,71.205) 75.938,69.85 ; P-R3.1@78.553,69.409 ccw(c77.49,68.346) 77.49,69.85 ccw(c77.49,71.354) P-R3.1@78.553,70.291 ; P-R3.1@78.733,69.589 ccw(c78.103,68.959) 78.103,69.85 ccw(c78.103,70.741) P-R3.1@78.733,70.111
NetD2-0_1: D2-0.1 P-R0.2 | length 10.4
  Top Layer w0.254: D2-0.1@111.821,92.837 114.071,92.837 114.198,92.71 P-R0.2@116.459,92.71 ; D2-0.1@112.191,92.467 cw(c113.084,91.574) 113.084,92.837 cw(c113.084,94.1) D2-0.1@112.191,93.207 ; P-R0.2@116.018,92.269 ccw(c114.955,91.206) 114.955,92.71 ccw(c114.955,94.214) P-R0.2@116.018,93.151 ; P-R0.2@116.198,92.449 ccw(c115.568,91.819) 115.568,92.71 ccw(c115.568,93.601) P-R0.2@116.198,92.971
NetD2-1_1: D2-1.1 P-R1.2 | length 10.1
  Top Layer w0.254: D2-1.1@74.61,92.583 P-R1.2@78.994,92.583 ; D2-1.1@74.98,92.213 cw(c75.873,91.32) 75.873,92.583 cw(c75.873,93.846) D2-1.1@74.98,92.953 ; P-R1.2@78.553,92.142 ccw(c77.49,91.079) 77.49,92.583 ccw(c77.49,94.087) P-R1.2@78.553,93.024 ; P-R1.2@78.733,92.322 ccw(c78.103,91.692) 78.103,92.583 ccw(c78.103,93.474) P-R1.2@78.733,92.844
NetD2-2_1: D2-2.1 P-R2.3 | length 10.1
  Top Layer w0.254: D2-2.1@112.268,54.61 P-R2.3@116.586,54.61 ; D2-2.1@112.638,54.24 cw(c113.531,53.347) 113.531,54.61 cw(c113.531,55.873) D2-2.1@112.638,54.98 ; P-R2.3@116.145,54.169 ccw(c115.082,53.106) 115.082,54.61 ccw(c115.082,56.114) P-R2.3@116.145,55.051 ; P-R2.3@116.325,54.349 ccw(c115.695,53.719) 115.695,54.61 ccw(c115.695,55.501) P-R2.3@116.325,54.871
NetD2-3_1: D2-3.1 P-R3.2 | length 10.8
  Top Layer w0.254: D2-3.1@74.61,67.437 74.737,67.31 P-R3.2@78.994,67.31 ; D2-3.1@74.8,67.527 ccw(c75.325,68.052) 75.325,67.31 ; D2-3.1@74.98,66.967 cw(c75.807,66.14) 75.807,67.31 ; D2-3.1@74.98,67.707 ccw(c75.938,68.665) 75.938,67.31 ; P-R3.2@78.553,66.869 ccw(c77.49,65.806) 77.49,67.31 ccw(c77.49,68.814) P-R3.2@78.553,67.751 ; P-R3.2@78.733,67.049 ccw(c78.103,66.419) 78.103,67.31 ccw(c78.103,68.201) P-R3.2@78.733,67.571
NetD3-0_1: D3-0.1 P-R0.3 | length 10.1
  Top Layer w0.254: D3-0.1@111.821,90.297 116.332,90.297 P-R0.3@116.459,90.17 ; D3-0.1@112.191,89.927 cw(c113.084,89.034) 113.084,90.297 cw(c113.084,91.56) D3-0.1@112.191,90.667 ; 114.648,90.297 cw(c114.648,88.359) P-R0.3@116.018,89.729 ; P-R0.3@116.018,90.611 cw(c115.262,91.367) 115.262,90.297 cw(c115.262,88.973) P-R0.3@116.198,89.909
NetD3-1_1: D3-1.1 P-R1.3 | length 10.1
  Top Layer w0.254: D3-1.1@74.61,90.043 P-R1.3@78.994,90.043 ; D3-1.1@74.98,89.673 cw(c75.873,88.78) 75.873,90.043 cw(c75.873,91.306) D3-1.1@74.98,90.413 ; P-R1.3@78.553,89.602 ccw(c77.49,88.539) 77.49,90.043 ccw(c77.49,91.547) P-R1.3@78.553,90.484 ; P-R1.3@78.733,89.782 ccw(c78.103,89.152) 78.103,90.043 ccw(c78.103,90.934) P-R1.3@78.733,90.304
NetD3-2_1: D3-2.1 P-R2.4 | length 10.1
  Top Layer w0.254: D3-2.1@112.268,57.15 P-R2.4@116.586,57.15 ; D3-2.1@112.638,56.78 cw(c113.531,55.887) 113.531,57.15 cw(c113.531,58.413) D3-2.1@112.638,57.52 ; P-R2.4@116.145,56.709 ccw(c115.082,55.646) 115.082,57.15 ccw(c115.082,58.654) P-R2.4@116.145,57.591 ; P-R2.4@116.325,56.889 ccw(c115.695,56.259) 115.695,57.15 ccw(c115.695,58.041) P-R2.4@116.325,57.411
NetD3-3_1: D3-3.1 P-R3.3 | length 10.8
  Top Layer w0.254: D3-3.1@74.61,64.897 74.737,64.77 P-R3.3@78.994,64.77 ; D3-3.1@74.8,64.987 ccw(c75.325,65.512) 75.325,64.77 ; D3-3.1@74.98,64.427 cw(c75.807,63.6) 75.807,64.77 ; D3-3.1@74.98,65.167 ccw(c75.938,66.125) 75.938,64.77 ; P-R3.3@78.553,64.329 ccw(c77.49,63.266) 77.49,64.77 ccw(c77.49,66.274) P-R3.3@78.553,65.211 ; P-R3.3@78.733,64.509 ccw(c78.103,63.879) 78.103,64.77 ccw(c78.103,65.661) P-R3.3@78.733,65.031
NetD4-0_1: D4-0.1 P-R0.4 | length 10.4
  Top Layer w0.254: D4-0.1@111.821,87.63 P-R0.4@116.459,87.63 ; D4-0.1@112.191,87.26 cw(c113.084,86.367) 113.084,87.63 cw(c113.084,88.893) D4-0.1@112.191,88 ; P-R0.4@116.018,87.189 ccw(c114.955,86.126) 114.955,87.63 ccw(c114.955,89.134) P-R0.4@116.018,88.071 ; P-R0.4@116.198,87.369 ccw(c115.568,86.739) 115.568,87.63 ccw(c115.568,88.521) P-R0.4@116.198,87.891
NetD4-1_1: D4-1.1 P-R1.4 | length 10.1
  Top Layer w0.254: D4-1.1@74.61,87.503 P-R1.4@78.994,87.503 ; D4-1.1@74.98,87.133 cw(c75.873,86.24) 75.873,87.503 cw(c75.873,88.766) D4-1.1@74.98,87.873 ; P-R1.4@78.553,87.062 ccw(c77.49,85.999) 77.49,87.503 ccw(c77.49,89.007) P-R1.4@78.553,87.944 ; P-R1.4@78.733,87.242 ccw(c78.103,86.612) 78.103,87.503 ccw(c78.103,88.394) P-R1.4@78.733,87.764
NetD4-2_1: D4-2.1 P-R2.5 | length 10.1
  Top Layer w0.254: D4-2.1@112.268,59.69 P-R2.5@116.586,59.69 ; D4-2.1@112.638,59.32 cw(c113.531,58.427) 113.531,59.69 cw(c113.531,60.953) D4-2.1@112.638,60.06 ; P-R2.5@116.145,59.249 ccw(c115.082,58.186) 115.082,59.69 ccw(c115.082,61.194) P-R2.5@116.145,60.131 ; P-R2.5@116.325,59.429 ccw(c115.695,58.799) 115.695,59.69 ccw(c115.695,60.581) P-R2.5@116.325,59.951
NetD4-3_1: D4-3.1 P-R3.4 | length 10.8
  Top Layer w0.254: D4-3.1@74.61,62.357 74.737,62.23 P-R3.4@78.994,62.23 ; D4-3.1@74.8,62.447 ccw(c75.325,62.972) 75.325,62.23 ; D4-3.1@74.98,61.887 cw(c75.807,61.06) 75.807,62.23 ; D4-3.1@74.98,62.627 ccw(c75.938,63.585) 75.938,62.23 ; P-R3.4@78.553,61.789 ccw(c77.49,60.726) 77.49,62.23 ccw(c77.49,63.734) P-R3.4@78.553,62.671 ; P-R3.4@78.733,61.969 ccw(c78.103,61.339) 78.103,62.23 ccw(c78.103,63.121) P-R3.4@78.733,62.491
NetD5-0_1: D5-0.1 P-R0.5 | length 10.4
  Top Layer w0.254: D5-0.1@111.821,85.09 P-R0.5@116.459,85.09 ; D5-0.1@112.191,84.72 cw(c113.084,83.827) 113.084,85.09 cw(c113.084,86.353) D5-0.1@112.191,85.46 ; P-R0.5@116.018,84.649 ccw(c114.955,83.586) 114.955,85.09 ccw(c114.955,86.594) P-R0.5@116.018,85.531 ; P-R0.5@116.198,84.829 ccw(c115.568,84.199) 115.568,85.09 ccw(c115.568,85.981) P-R0.5@116.198,85.351
NetD5-1_1: D5-1.1 P-R1.5 | length 10.2
  Top Layer w0.254: D5-1.1@74.61,84.836 76.733,84.836 76.86,84.963 P-R1.5@78.994,84.963 ; D5-1.1@74.98,84.466 cw(c75.873,83.573) 75.873,84.836 cw(c75.873,86.099) D5-1.1@74.98,85.206 ; P-R1.5@78.553,84.522 ccw(c77.49,83.459) 77.49,84.963 ccw(c77.49,86.467) P-R1.5@78.553,85.404 ; P-R1.5@78.733,84.702 ccw(c78.103,84.072) 78.103,84.963 ccw(c78.103,85.854) P-R1.5@78.733,85.224
NetD5-2_1: D5-2.1 P-R2.6 | length 10.1
  Top Layer w0.254: D5-2.1@112.268,62.23 P-R2.6@116.586,62.23 ; D5-2.1@112.638,61.86 cw(c113.531,60.967) 113.531,62.23 cw(c113.531,63.493) D5-2.1@112.638,62.6 ; P-R2.6@116.145,61.789 ccw(c115.082,60.726) 115.082,62.23 ccw(c115.082,63.734) P-R2.6@116.145,62.671 ; P-R2.6@116.325,61.969 ccw(c115.695,61.339) 115.695,62.23 ccw(c115.695,63.121) P-R2.6@116.325,62.491
NetD5-3_1: D5-3.1 P-R3.5 | length 10.8
  Top Layer w0.254: D5-3.1@74.61,59.817 74.737,59.69 P-R3.5@78.994,59.69 ; D5-3.1@74.8,59.907 ccw(c75.325,60.432) 75.325,59.69 ; D5-3.1@74.98,59.347 cw(c75.807,58.52) 75.807,59.69 ; D5-3.1@74.98,60.087 ccw(c75.938,61.045) 75.938,59.69 ; P-R3.5@78.553,59.249 ccw(c77.49,58.186) 77.49,59.69 ccw(c77.49,61.194) P-R3.5@78.553,60.131 ; P-R3.5@78.733,59.429 ccw(c78.103,58.799) 78.103,59.69 ccw(c78.103,60.581) P-R3.5@78.733,59.951
NetD6-0_1: D6-0.1 P-R0.6 | length 10.4
  Top Layer w0.254: D6-0.1@111.821,82.55 P-R0.6@116.459,82.55 ; D6-0.1@112.191,82.18 cw(c113.084,81.287) 113.084,82.55 cw(c113.084,83.813) D6-0.1@112.191,82.92 ; P-R0.6@116.018,82.109 ccw(c114.955,81.046) 114.955,82.55 ccw(c114.955,84.054) P-R0.6@116.018,82.991 ; P-R0.6@116.198,82.289 ccw(c115.568,81.659) 115.568,82.55 ccw(c115.568,83.441) P-R0.6@116.198,82.811
NetD6-1_1: D6-1.1 P-R1.6 | length 10.2
  Top Layer w0.254: D6-1.1@74.61,82.296 76.733,82.296 76.86,82.423 P-R1.6@78.994,82.423 ; D6-1.1@74.98,81.926 cw(c75.873,81.033) 75.873,82.296 cw(c75.873,83.559) D6-1.1@74.98,82.666 ; P-R1.6@78.553,81.982 ccw(c77.49,80.919) 77.49,82.423 ccw(c77.49,83.927) P-R1.6@78.553,82.864 ; P-R1.6@78.733,82.162 ccw(c78.103,81.532) 78.103,82.423 ccw(c78.103,83.314) P-R1.6@78.733,82.684
NetD6-2_1: D6-2.1 P-R2.7 | length 10.1
  Top Layer w0.254: D6-2.1@112.268,64.77 P-R2.7@116.586,64.77 ; D6-2.1@112.638,64.4 cw(c113.531,63.507) 113.531,64.77 cw(c113.531,66.033) D6-2.1@112.638,65.14 ; P-R2.7@116.145,64.329 ccw(c115.082,63.266) 115.082,64.77 ccw(c115.082,66.274) P-R2.7@116.145,65.211 ; P-R2.7@116.325,64.509 ccw(c115.695,63.879) 115.695,64.77 ccw(c115.695,65.661) P-R2.7@116.325,65.031
NetD6-3_1: D6-3.1 P-R3.6 | length 10.8
  Top Layer w0.254: D6-3.1@74.61,57.277 74.737,57.15 P-R3.6@78.994,57.15 ; D6-3.1@74.8,57.367 ccw(c75.325,57.892) 75.325,57.15 ; D6-3.1@74.98,56.807 cw(c75.807,55.98) 75.807,57.15 ; D6-3.1@74.98,57.547 ccw(c75.938,58.505) 75.938,57.15 ; P-R3.6@78.553,56.709 ccw(c77.49,55.646) 77.49,57.15 ccw(c77.49,58.654) P-R3.6@78.553,57.591 ; P-R3.6@78.733,56.889 ccw(c78.103,56.259) 78.103,57.15 ccw(c78.103,58.041) P-R3.6@78.733,57.411
NetD7-0_1: D7-0.1 P-R0.7 | length 10.4
  Top Layer w0.254: D7-0.1@111.821,80.01 P-R0.7@116.459,80.01 ; D7-0.1@112.191,79.64 cw(c113.084,78.747) 113.084,80.01 cw(c113.084,81.273) D7-0.1@112.191,80.38 ; P-R0.7@116.018,79.569 ccw(c114.955,78.506) 114.955,80.01 ccw(c114.955,81.514) P-R0.7@116.018,80.451 ; P-R0.7@116.198,79.749 ccw(c115.568,79.119) 115.568,80.01 ccw(c115.568,80.901) P-R0.7@116.198,80.271
NetD7-1_1: D7-1.1 P-R1.7 | length 10.2
  Top Layer w0.254: D7-1.1@74.61,79.756 76.733,79.756 76.86,79.883 P-R1.7@78.994,79.883 ; D7-1.1@74.98,79.386 cw(c75.873,78.493) 75.873,79.756 cw(c75.873,81.019) D7-1.1@74.98,80.126 ; P-R1.7@78.553,79.442 ccw(c77.49,78.379) 77.49,79.883 ccw(c77.49,81.387) P-R1.7@78.553,80.324 ; P-R1.7@78.733,79.622 ccw(c78.103,78.992) 78.103,79.883 ccw(c78.103,80.774) P-R1.7@78.733,80.144
NetD7-2_1: D7-2.1 P-R2.8 | length 10.1
  Top Layer w0.254: D7-2.1@112.268,67.31 P-R2.8@116.586,67.31 ; D7-2.1@112.638,66.94 cw(c113.531,66.047) 113.531,67.31 cw(c113.531,68.573) D7-2.1@112.638,67.68 ; P-R2.8@116.145,66.869 ccw(c115.082,65.806) 115.082,67.31 ccw(c115.082,68.814) P-R2.8@116.145,67.751 ; P-R2.8@116.325,67.049 ccw(c115.695,66.419) 115.695,67.31 ccw(c115.695,68.201) P-R2.8@116.325,67.571
NetD7-3_1: D7-3.1 P-R3.7 | length 10.8
  Top Layer w0.254: D7-3.1@74.61,54.737 74.737,54.61 P-R3.7@78.994,54.61 ; D7-3.1@74.8,54.827 ccw(c75.325,55.352) 75.325,54.61 ; D7-3.1@74.98,54.267 cw(c75.807,53.44) 75.807,54.61 ; D7-3.1@74.98,55.007 ccw(c75.938,55.965) 75.938,54.61 ; P-R3.7@78.553,54.169 ccw(c77.49,53.106) 77.49,54.61 ccw(c77.49,56.114) P-R3.7@78.553,55.051 ; P-R3.7@78.733,54.349 ccw(c78.103,53.719) 78.103,54.61 ccw(c78.103,55.501) P-R3.7@78.733,54.871
NetD8-0_1: D8-0.1 P-R0.8 | length 10.4
  Top Layer w0.254: D8-0.1@111.821,77.47 P-R0.8@116.459,77.47 ; D8-0.1@112.191,77.1 cw(c113.084,76.207) 113.084,77.47 cw(c113.084,78.733) D8-0.1@112.191,77.84 ; P-R0.8@116.018,77.029 ccw(c114.955,75.966) 114.955,77.47 ccw(c114.955,78.974) P-R0.8@116.018,77.911 ; P-R0.8@116.198,77.209 ccw(c115.568,76.579) 115.568,77.47 ccw(c115.568,78.361) P-R0.8@116.198,77.731
NetD8-1_1: D8-1.1 P-R1.8 | length 10.2
  Top Layer w0.254: D8-1.1@74.61,77.216 76.733,77.216 76.86,77.343 P-R1.8@78.994,77.343 ; D8-1.1@74.98,76.846 cw(c75.873,75.953) 75.873,77.216 cw(c75.873,78.479) D8-1.1@74.98,77.586 ; P-R1.8@78.553,76.902 ccw(c77.49,75.839) 77.49,77.343 ccw(c77.49,78.847) P-R1.8@78.553,77.784 ; P-R1.8@78.733,77.082 ccw(c78.103,76.452) 78.103,77.343 ccw(c78.103,78.234) P-R1.8@78.733,77.604
NetD8-2_1: D8-2.1 P-R2.9 | length 10.1
  Top Layer w0.254: D8-2.1@112.268,69.85 P-R2.9@116.586,69.85 ; D8-2.1@112.638,69.48 cw(c113.531,68.587) 113.531,69.85 cw(c113.531,71.113) D8-2.1@112.638,70.22 ; P-R2.9@116.145,69.409 ccw(c115.082,68.346) 115.082,69.85 ccw(c115.082,71.354) P-R2.9@116.145,70.291 ; P-R2.9@116.325,69.589 ccw(c115.695,68.959) 115.695,69.85 ccw(c115.695,70.741) P-R2.9@116.325,70.111
NetD8-3_1: D8-3.1 P-R3.8 | length 10.8
  Top Layer w0.254: D8-3.1@74.61,52.197 74.737,52.07 P-R3.8@78.994,52.07 ; D8-3.1@74.8,52.287 ccw(c75.325,52.812) 75.325,52.07 ; D8-3.1@74.98,51.727 cw(c75.807,50.9) 75.807,52.07 ; D8-3.1@74.98,52.467 ccw(c75.938,53.425) 75.938,52.07 ; P-R3.8@78.553,51.629 ccw(c77.49,50.566) 77.49,52.07 ccw(c77.49,53.574) P-R3.8@78.553,52.511 ; P-R3.8@78.733,51.809 ccw(c78.103,51.179) 78.103,52.07 ccw(c78.103,52.961) P-R3.8@78.733,52.331
NetDS1_8: DS1.3 DS1.8 Q1.3 | length 53.4
  Top Layer w0.254: DS1.3@110.171,101.688 ccw(c108.546,101.688) 109.695,102.836 ccw(c110.844,103.985) DS1.3@110.844,102.361 ; DS1.8@110.171,116.888 cw(c108.546,116.888) 109.695,115.739 cw(c110.844,114.59) DS1.8@110.844,116.215 ; DS1.3@110.425,101.688 ccw(c109.413,101.688) 110.129,102.403 ccw(c110.844,103.118) DS1.3@110.844,102.107 ; DS1.8@110.425,116.888 cw(c109.413,116.888) 110.129,116.172 cw(c110.844,115.457) DS1.8@110.844,116.469 ; DS1.3@110.844,101.015 cw(c110.844,99.39) 111.993,100.539 cw(c113.142,101.688) DS1.3@111.517,101.688 ; DS1.3@110.844,101.269 cw(c110.844,100.257) 111.559,100.972 cw(c112.275,101.688) DS1.3@111.263,101.688 ; DS1.8@110.844,116.888 104.775,110.819 104.775,104.648 106.045,103.378 109.154,103.378 DS1.3@110.844,101.688 112.71,99.822 120.523,99.822 121.351,98.994 Q1.3@121.351,93.927 ; 121.351,94.872 ccw(c122.07,94.872) 121.562,94.363 cw(c122.07,94.872) 121.351,94.872 ; 121.351,94.872 cw(c120.631,94.872) 121.14,94.363 ccw(c120.631,94.872) 121.351,94.872
NetDS2_8: DS2.3 DS2.8 Q2.3 | length 44.1
  Top Layer w0.254: DS2.3@123.671,101.561 123.671,100.611 ; Q2.3@125.542,93.927 125.542,98.74 123.671,100.611 ; 123.671,100.611 ccw(c123.338,100.611) 123.448,100.926 cw(c123.338,100.611) 123.671,100.611 ; 123.671,100.611 cw(c124.004,100.611) 123.894,100.926 ccw(c124.004,100.611) 123.671,100.611 ; 125.542,94.872 ccw(c126.261,94.872) 125.753,94.363 cw(c126.261,94.872) 125.542,94.872 ; 125.542,94.872 cw(c124.822,94.872) 125.331,94.363 ccw(c124.822,94.872) 125.542,94.872
  Bottom Layer w0.254: DS2.3@123.671,101.561 DS2.8@123.671,116.761 ; 123.671,102.572 ccw(c124.683,102.572) 123.967,101.857 cw(c124.683,102.572) 123.671,102.572 ; 123.671,102.572 cw(c122.659,102.572) 123.375,101.857 ccw(c122.659,102.572) 123.671,102.572 ; 123.671,103.185 ccw(c125.296,103.185) 124.147,102.036 cw(c125.296,103.185) 123.671,103.185 ; 123.671,103.185 cw(c122.046,103.185) 123.195,102.036 ccw(c122.046,103.185) 123.671,103.185 ; 123.671,115.136 ccw(c122.046,115.136) 123.195,116.285 cw(c122.046,115.136) 123.671,115.136 ; 123.671,115.136 cw(c125.296,115.136) 124.147,116.285 ccw(c125.296,115.136) 123.671,115.136 ; 123.671,115.749 ccw(c122.659,115.749) 123.375,116.464 cw(c122.659,115.749) 123.671,115.749 ; 123.671,115.749 cw(c124.683,115.749) 123.967,116.464 ccw(c124.683,115.749) 123.671,115.749
NetDS3_8: DS3.3 DS3.8 Q3.3 | length 67.6
  Top Layer w0.254: Q3.3@129.86,93.927 129.86,95.565 124.968,100.457 124.968,102.997 125.984,104.013 136.144,104.013 136.498,103.659 DS3.3@136.498,101.561 ; 129.86,94.872 ccw(c130.579,94.872) 130.071,94.363 cw(c130.579,94.872) 129.86,94.872 ; 129.86,94.872 cw(c129.14,94.872) 129.649,94.363 ccw(c129.14,94.872) 129.86,94.872 ; 136.498,102.572 ccw(c137.51,102.572) 136.794,101.857 cw(c137.51,102.572) 136.498,102.572 ; 136.498,102.572 cw(c135.486,102.572) 136.202,101.857 ccw(c135.486,102.572) 136.498,102.572 ; 136.498,103.185 ccw(c138.123,103.185) 136.974,102.036 cw(c138.123,103.185) 136.498,103.185 ; 136.498,103.185 cw(c134.873,103.185) 136.022,102.036 ccw(c134.873,103.185) 136.498,103.185
  Bottom Layer w0.254: DS3.3@136.498,101.561 DS3.8@136.498,116.761 ; 136.498,102.572 ccw(c137.51,102.572) 136.794,101.857 cw(c137.51,102.572) 136.498,102.572 ; 136.498,102.572 cw(c135.486,102.572) 136.202,101.857 ccw(c135.486,102.572) 136.498,102.572 ; 136.498,103.185 ccw(c138.123,103.185) 136.974,102.036 cw(c138.123,103.185) 136.498,103.185 ; 136.498,103.185 cw(c134.873,103.185) 136.022,102.036 ccw(c134.873,103.185) 136.498,103.185 ; 136.498,115.136 ccw(c134.873,115.136) 136.022,116.285 cw(c134.873,115.136) 136.498,115.136 ; 136.498,115.136 cw(c138.123,115.136) 136.974,116.285 ccw(c138.123,115.136) 136.498,115.136 ; 136.498,115.749 ccw(c135.486,115.749) 136.202,116.464 cw(c135.486,115.749) 136.498,115.749 ; 136.498,115.749 cw(c137.51,115.749) 136.794,116.464 ccw(c137.51,115.749) 136.498,115.749
NetDS4_8: DS4.3 DS4.8 Q4.3 | length 106.3
  Top Layer w0.254: v1(127.381,102.87) 127.381,100.457 127.966,99.872 133.358,99.872 134.178,99.052 Q4.3@134.178,93.927 ; 127.381,101.644 ccw(c126.155,101.644) 127.022,102.511 cw(c126.155,101.644) 127.381,101.644 ; 127.381,101.644 cw(c128.607,101.644) 127.74,102.511 ccw(c128.607,101.644) 127.381,101.644 ; 134.178,94.872 ccw(c134.897,94.872) 134.389,94.363 cw(c134.897,94.872) 134.178,94.872 ; 134.178,94.872 cw(c133.458,94.872) 133.967,94.363 ccw(c133.458,94.872) 134.178,94.872
  Bottom Layer w0.254: v1(127.381,102.87) 127.381,108.839 124.968,111.252 124.968,117.856 125.562,118.45 147.763,118.45 DS4.8@149.452,116.761 DS4.3@149.452,101.561 ; 127.381,104.096 ccw(c128.607,104.096) 127.74,103.229 cw(c128.607,104.096) 127.381,104.096 ; 127.381,104.096 cw(c126.155,104.096) 127.022,103.229 ccw(c126.155,104.096) 127.381,104.096 ; 148.303,117.909 ccw(c149.452,119.058) 149.452,117.434 cw(c149.452,119.058) 148.303,117.909 ; 148.303,117.909 cw(c147.154,116.761) 148.779,116.761 ccw(c147.154,116.761) 148.303,117.909 ; 148.737,117.476 ccw(c149.452,118.191) 149.452,117.18 cw(c149.452,118.191) 148.737,117.476 ; 148.737,117.476 cw(c148.021,116.761) 149.033,116.761 ccw(c148.021,116.761) 148.737,117.476 ; 149.452,102.572 ccw(c150.464,102.572) 149.748,101.857 cw(c150.464,102.572) 149.452,102.572 ; 149.452,102.572 cw(c148.44,102.572) 149.156,101.857 ccw(c148.44,102.572) 149.452,102.572 ; 149.452,103.185 ccw(c151.077,103.185) 149.928,102.036 cw(c151.077,103.185) 149.452,103.185 ; 149.452,103.185 cw(c147.827,103.185) 148.976,102.036 ccw(c147.827,103.185) 149.452,103.185 ; 149.452,115.136 ccw(c147.827,115.136) 148.976,116.285 cw(c147.827,115.136) 149.452,115.136 ; 149.452,115.136 cw(c151.077,115.136) 149.928,116.285 ccw(c151.077,115.136) 149.452,115.136 ; 149.452,115.749 ccw(c148.44,115.749) 149.156,116.464 cw(c148.44,115.749) 149.452,115.749 ; 149.452,115.749 cw(c150.464,115.749) 149.748,116.464 ccw(c150.464,115.749) 149.452,115.749
NetJ1_1: ?.1 KEY.1 USB.1 | length 40
  Top Layer w0.5: ?.1@51.816,108.1 cw(c51.816,106.622) 52.861,107.667 cw(c53.906,108.712) ?.1@52.428,108.712 ; ?.1@51.816,108.712 54.356,106.172 KEY.1@57.404,106.172 60.198,103.378 76.835,103.378 77.735,104.278 USB.1@77.735,106.209 ; KEY.1@56.927,105.695 ccw(c55.774,104.542) 55.774,106.172 ccw(c55.774,107.802) KEY.1@56.927,106.649 ; KEY.1@57.404,105.497 cw(c57.404,103.867) 58.556,105.02 cw(c59.709,106.172) KEY.1@58.079,106.172 ; USB.1@77.347,105.821 cw(c76.408,104.882) 77.735,104.882 cw(c79.063,104.882) USB.1@78.124,105.821
NetJ1_2: ?.2 ?.3 KEY.4 USB.4 | length 59.6
  Top Layer w0.5: KEY.4@57.404,110.577 cw(c57.404,108.947) 58.556,110.1 cw(c59.709,111.252) KEY.4@58.079,111.252 ; KEY.4@57.404,111.252 60.198,108.458 64.487,108.458 65.532,107.413 65.532,104.775 66.04,104.267 69.977,104.267 70.736,105.026 ; USB.4@70.381,105.789 cw(c69.736,105.026) 70.736,105.026 ; USB.4@70.736,106.209 70.736,105.026 ; USB.4@71.09,105.789 ccw(c71.735,105.026) 70.736,105.026
  Bottom Layer w0.5: ?.3@46.736,108.712 46.736,106.807 47.371,106.172 ?.2@49.276,106.172 49.276,109.728 50.8,111.252 KEY.4@57.404,111.252 ; 46.736,107.234 ccw(c45.258,107.234) 46.303,108.279 cw(c45.258,107.234) 46.736,107.234 ; 46.736,107.234 cw(c48.214,107.234) 47.169,108.279 ccw(c48.214,107.234) 46.736,107.234 ; 47.798,106.172 ccw(c47.798,107.65) ?.2@48.843,106.605 ; 47.798,106.172 cw(c47.798,104.694) 48.843,105.739 ccw(c47.798,104.694) 47.798,106.172 ; 47.798,106.172 ccw(c47.798,107.65) ?.2@48.843,106.605 ; ?.2@48.843,106.605 ccw(c47.798,107.65) 49.276,107.65 ; ?.2@48.843,106.605 ccw(c47.798,107.65) 49.276,107.65 ; 49.276,107.65 ccw(c50.754,107.65) 49.709,106.605 cw(c50.754,107.65) 49.276,107.65 ; 55.774,111.252 ccw(c55.774,112.882) 56.927,111.729 cw(c55.774,112.882) 55.774,111.252 ; 55.774,111.252 cw(c55.774,109.622) 56.927,110.775 ccw(c55.774,109.622) 55.774,111.252
NetJ1_3: 
NetJ61_2: J61.2 MAX232.14 | length 12.5
  Top Layer w0.254: J61.2@49.528,70.89 53.113,70.89 MAX232.14@54.36,72.137 ; J61.2@49.856,70.562 cw(c50.648,69.77) 50.648,70.89 cw(c50.648,72.01) J61.2@49.856,71.218 ; J61.2@50.036,70.382 cw(c51.261,69.157) 51.261,70.89 cw(c51.261,72.623) J61.2@50.036,71.398 ; 53.232,71.01 ccw(c52.105,72.137) MAX232.14@53.699,72.137 ; 53.624,71.402 cw(c54.197,70.829) MAX232.14@54.197,71.639 ; 53.666,71.443 ccw(c52.972,72.137) MAX232.14@53.953,72.137
NetJ61_3: J61.3 MAX232.13 | length 10.4
  Top Layer w0.254: J61.3@49.528,73.66 50.545,74.677 ; J61.3@49.593,74.119 ccw(c49.691,74.811) 50.185,74.317 ccw(c50.679,73.823) J61.3@49.987,73.725 ; J61.3@49.629,74.371 ccw(c49.78,75.441) 50.545,74.677 ; J61.3@50.239,73.761 cw(c51.31,73.912) 50.545,74.677 ; MAX232.13@53.845,74.325 ccw(c52.995,73.475) 52.995,74.677 ccw(c52.995,75.879) MAX232.13@53.845,75.029 ; MAX232.13@54.36,74.677 50.545,74.677
NetJP0_1: JP0.1 P-R0.9 | length 19.9
  Bottom Layer w0.254: JP0.1@111.76,74.676 113.97,74.676 114.224,74.93 P-R0.9@116.459,74.93 ; 112.651,74.676 ccw(c112.651,73.785) 112.021,74.415 cw(c112.651,73.785) 112.651,74.676 ; 112.651,74.676 cw(c112.651,75.567) 112.021,74.937 ccw(c112.651,75.567) 112.651,74.676 ; 113.264,74.676 ccw(c113.264,73.172) 112.201,74.235 cw(c113.264,73.172) 113.264,74.676 ; 113.264,74.676 cw(c113.264,76.18) 112.201,75.117 ccw(c113.264,76.18) 113.264,74.676 ; 114.955,74.93 ccw(c114.955,76.434) 116.018,75.371 cw(c114.955,76.434) 114.955,74.93 ; 114.955,74.93 cw(c114.955,73.426) 116.018,74.489 ccw(c114.955,73.426) 114.955,74.93 ; 115.568,74.93 ccw(c115.568,75.821) 116.198,75.191 cw(c115.568,75.821) 115.568,74.93 ; 115.568,74.93 cw(c115.568,74.039) 116.198,74.669 ccw(c115.568,74.039) 115.568,74.93
NetJP1_1: JP1.1 P-R1.9 | length 9.2
  Top Layer w0.254: JP1.1@75.184,74.676 76.073,74.676 ; P-R1.9@78.553,74.362 ccw(c77.49,73.299) 77.49,74.803 ccw(c77.49,76.307) P-R1.9@78.553,75.244 ; P-R1.9@78.733,74.542 ccw(c78.103,73.912) 78.103,74.803 ccw(c78.103,75.694) P-R1.9@78.733,75.064 ; P-R1.9@78.994,74.803 76.2,74.803 76.073,74.676 ; 76.073,74.676 ccw(c76.073,74.353) 75.77,74.463 cw(c76.073,74.353) 76.073,74.676 ; 76.073,74.676 cw(c76.073,74.999) 75.77,74.889 ccw(c76.073,74.999) 76.073,74.676
NetJP2_1: JP2.1 P-R2.1 | length 13.4
  Top Layer w0.254: JP2.1@112.268,49.149 112.649,49.53 P-R2.1@116.586,49.53 ; JP2.1@112.349,49.068 cw(c113.465,47.952) 113.465,49.53 ; JP2.1@112.529,48.888 cw(c114.079,47.338) 114.079,49.53 ; JP2.1@112.709,48.708 cw(c114.692,46.725) 114.692,49.53 ; P-R2.1@116.145,49.089 ccw(c115.082,48.026) 115.082,49.53 ccw(c115.082,51.034) P-R2.1@116.145,49.971 ; P-R2.1@116.325,49.269 ccw(c115.695,48.639) 115.695,49.53 ccw(c115.695,50.421) P-R2.1@116.325,49.791
NetJP3_1: JP3.1 P-R3.9 | length 13.3
  Top Layer w0.254: JP3.1@74.803,49.149 75.184,49.53 P-R3.9@78.994,49.53 ; JP3.1@74.884,49.068 cw(c76,47.952) 76,49.53 ; JP3.1@75.064,48.888 cw(c76.614,47.338) 76.614,49.53 ; JP3.1@75.244,48.708 cw(c77.227,46.725) 77.227,49.53 ; P-R3.9@78.553,49.089 ccw(c77.49,48.026) 77.49,49.53 ccw(c77.49,51.034) P-R3.9@78.553,49.971 ; P-R3.9@78.733,49.269 ccw(c78.103,48.639) 78.103,49.53 ccw(c78.103,50.421) P-R3.9@78.733,49.791
NetJP6_1: JP5.1 R3.1 | length 30.1
  Top Layer w0.254: JP5.1@40.64,50.8 52.654,50.8 55.702,53.848 59.69,53.848 60.325,54.483 R3.1@60.325,57.597 ; JP5.1@40.901,50.539 cw(c41.531,49.909) 41.531,50.8 cw(c41.531,51.691) JP5.1@40.901,51.061 ; JP5.1@41.081,50.359 cw(c42.144,49.296) 42.144,50.8 cw(c42.144,52.304) JP5.1@41.081,51.241 ; R3.1@59.955,57.227 cw(c59.062,56.334) 60.325,56.334 cw(c61.588,56.334) R3.1@60.695,57.227
NetJP7_1: 24C02.6 JP7.1 R5.1 | length 25.4
  Top Layer w0.254: JP7.1@125.869,73.152 cw(c124.365,73.152) 125.428,72.088 cw(c126.492,71.025) JP7.1@126.492,72.529 ; R5.1@125.929,63.081 ccw(c125.036,63.974) 126.299,63.974 ccw(c127.562,63.974) R5.1@126.669,63.081 ; JP7.1@126.123,73.152 cw(c125.232,73.152) 125.862,72.522 cw(c126.492,71.892) JP7.1@126.492,72.783 ; JP7.1@126.492,73.152 125.095,71.755 125.095,69.215 126.299,68.011 R5.1@126.299,62.611 127.127,62.611 ; 24C02.6@128.58,60.093 ccw(c127.905,60.832) 128.906,60.832 ; 24C02.6@128.906,59.559 128.906,60.832 ; 24C02.6@129.232,60.093 cw(c129.907,60.832) 128.906,60.832 ; 127.127,62.611 ccw(c127.127,62.217) 126.771,62.386 cw(c127.127,62.217) 127.127,62.611 ; 127.127,62.611 cw(c127.127,63.005) 126.771,62.836 ccw(c127.127,63.005) 127.127,62.611 ; 127.127,62.611 128.906,60.832
NetJP7_3: 24C02.5 JP7.3 R4.1 | length 23.4
  Top Layer w0.254: JP7.3@126.492,69.989 cw(c126.492,68.485) 127.556,69.548 cw(c128.619,70.612) JP7.3@127.115,70.612 ; JP7.3@126.492,70.243 cw(c126.492,69.352) 127.122,69.982 cw(c127.752,70.612) JP7.3@126.861,70.612 ; JP7.3@126.492,70.612 131.379,65.725 R4.1@131.379,62.611 131.446,62.544 24C02.5@131.446,59.559 ; R4.1@131.009,62.141 cw(c129.955,61.087) 131.446,61.087 ; R4.1@131.009,63.081 ccw(c130.116,63.974) 131.379,63.974 ccw(c132.642,63.974) R4.1@131.749,63.081 ; 24C02.5@131.105,60.078 ccw(c130.281,60.902) 131.446,60.902 ccw(c132.611,60.902) 24C02.5@131.787,60.078 ; R4.1@131.189,62.321 cw(c130.568,61.7) 131.446,61.7 ; 131.446,61.41 cw(c132.48,61.41) R4.1@131.749,62.141
NetJP9_18: JP9.18